# Altium PCB sigma-delta-adc.PcbDoc
Units mm, origin at the board's own origin, x right, y up, seen from the top; angles counter-clockwise.
Board outline 38 x 15 mm, 2 copper layers (Top Layer, Bottom Layer); 16 components, 17 nets, 71 pads, 104 vias.
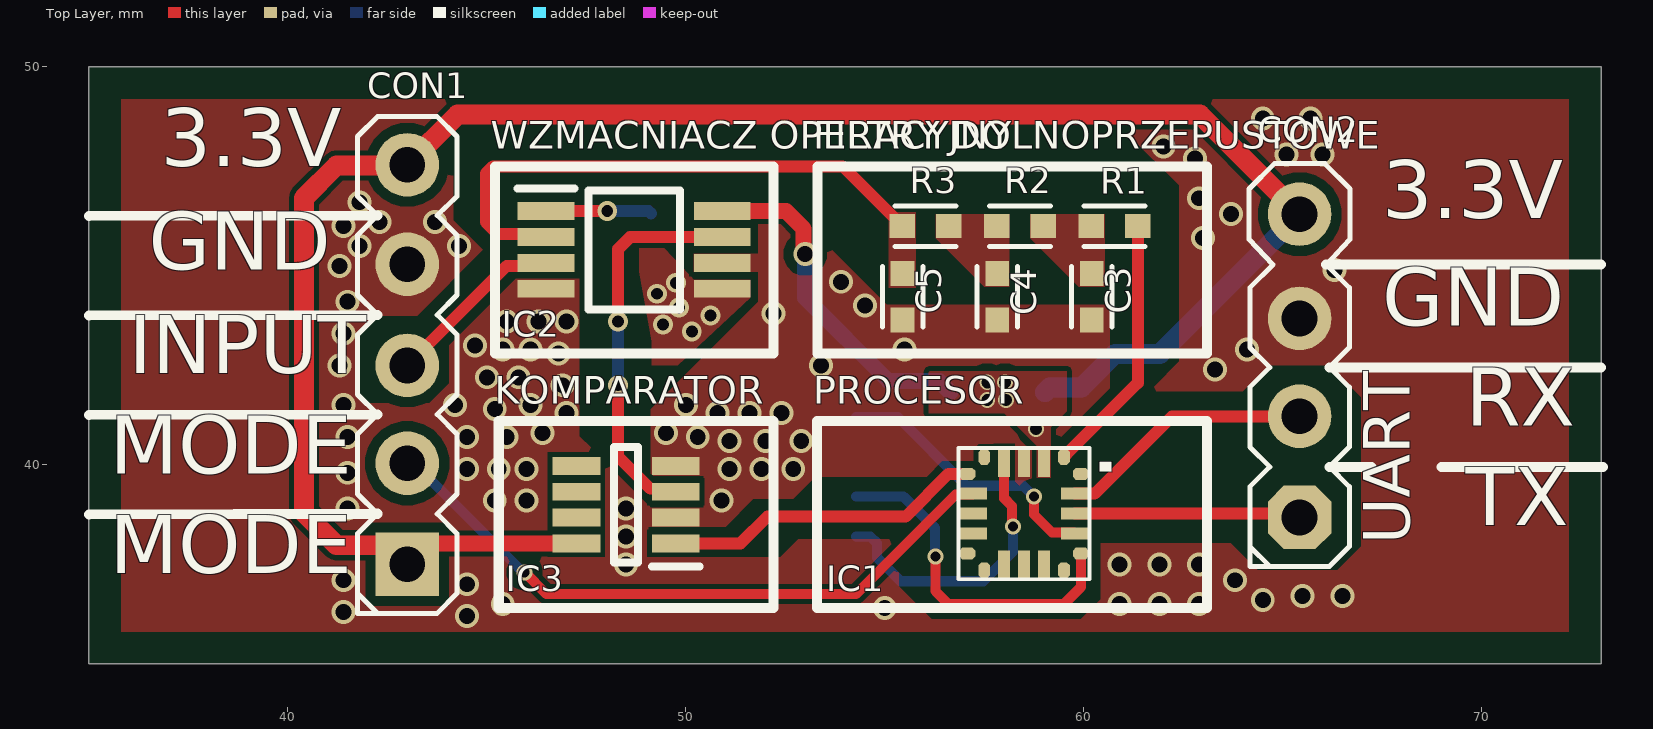
[diagram p0: Top Layer view]
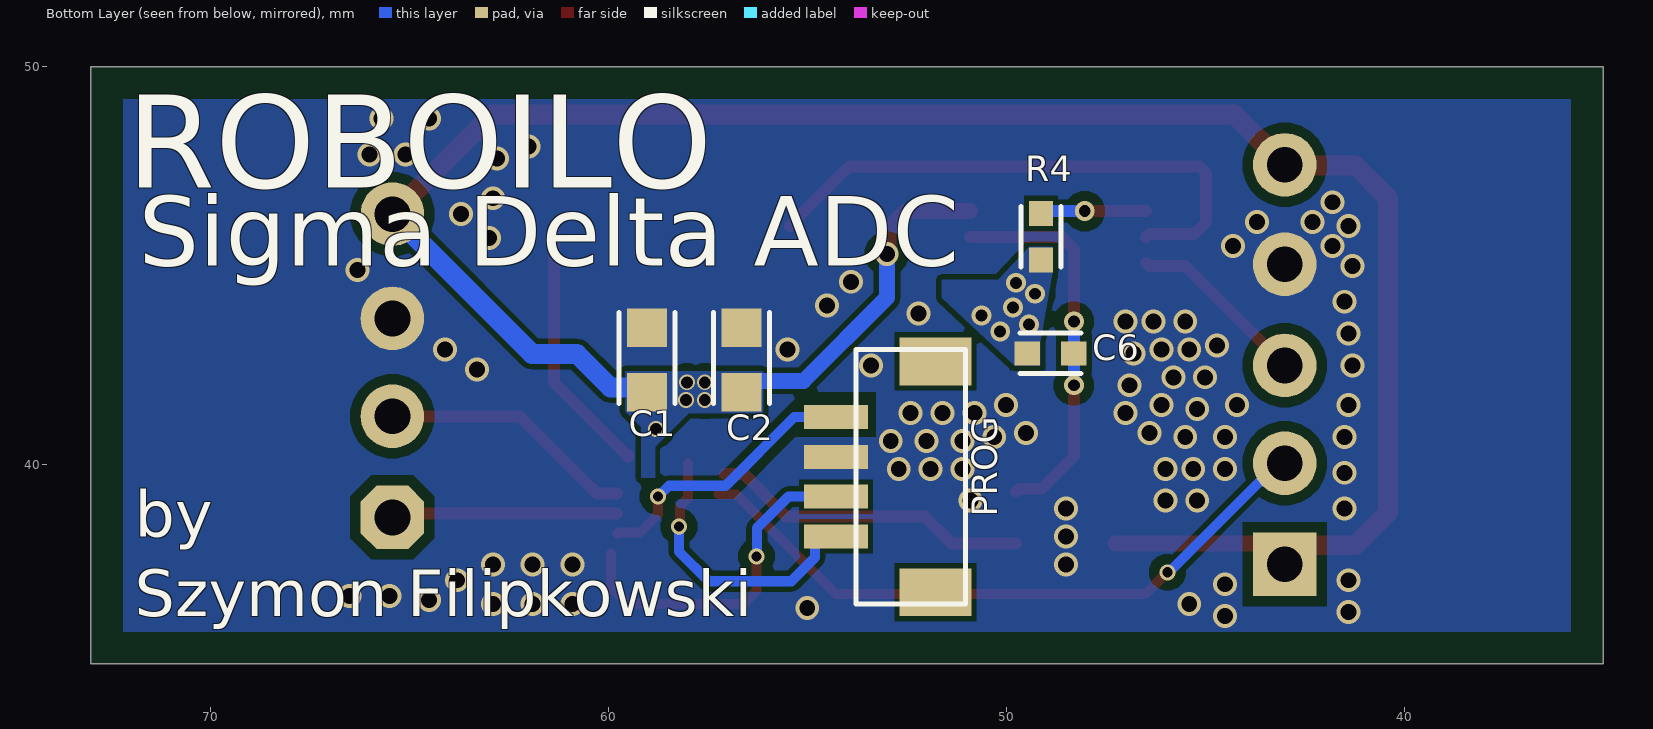
[diagram p1: Bottom Layer view, seen from below]
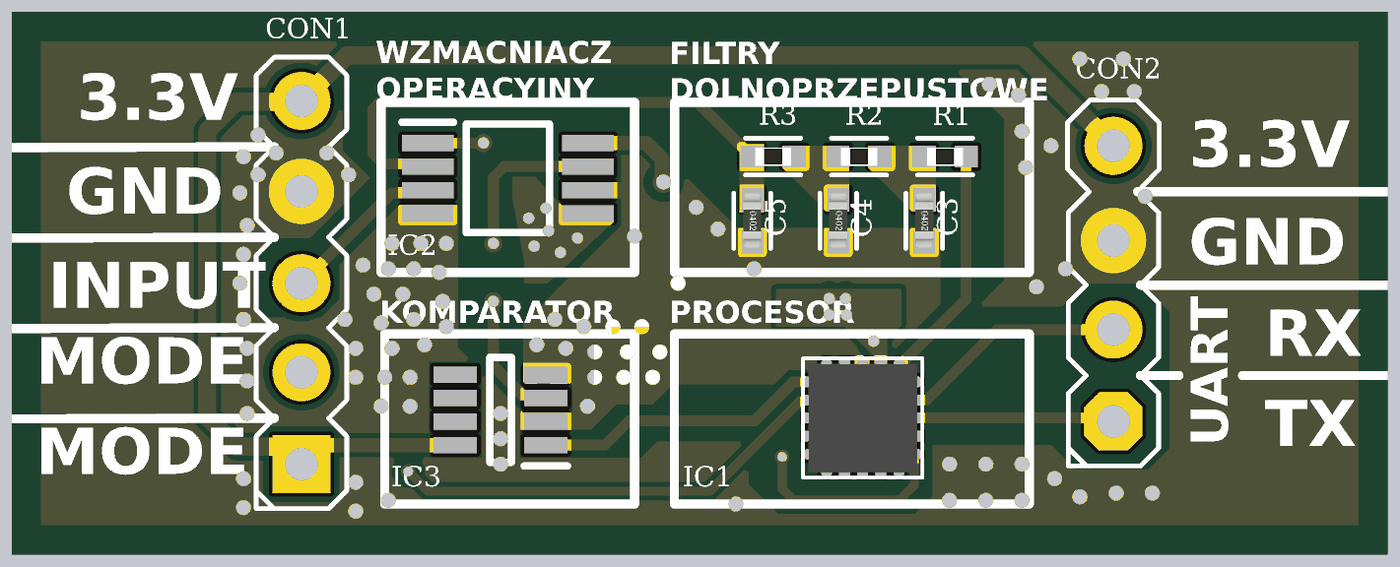
[diagram p2: 3D render of the assembled board from above, using the file's embedded part models]
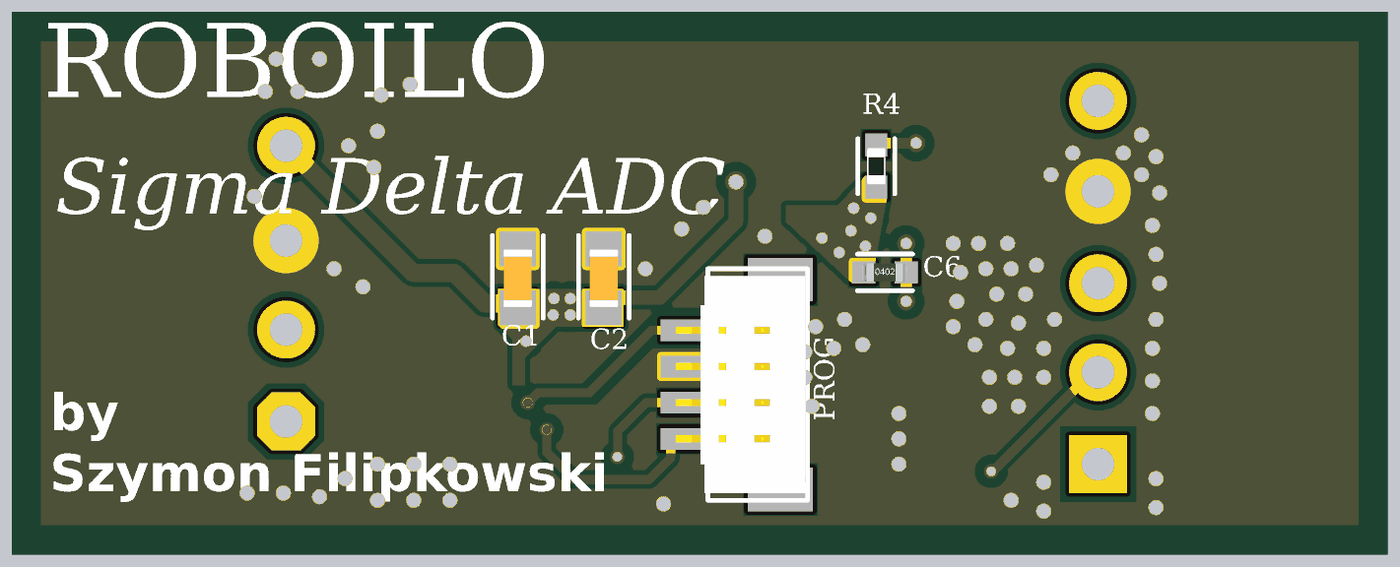
[diagram p3: 3D render of the assembled board from below, using the file's embedded part models]

## Layer stack, top to bottom
Top Solder: solder mask 0.0102, Solder Resist, Dk 3.5
Top Layer: signal copper 0.0356
Dielectric 1: dielectric 0.32, FR-4, Dk 4.8
Bottom Layer: signal copper 0.0356
Bottom Solder: solder mask 0.0102, Solder Resist, Dk 3.5

## Board outline
35,35 73,35 73,50 35,50

## Design rules (kind name [scope] priority, off if disabled: settings)
BoardOutlineClearance [All] p1: gap=0.8 ignorepadtopadclearanceinfootprint=FALSE
Clearance [All] p1: gap=0.127 ignorepadtopadclearanceinfootprint=TRUE except(0.2: Arc-THPad Track-THPad SMDPad-THPad; 0.254: THPad-Fill THPad-Poly THPad-Region Via-Fill Via-Poly Via-Region; 0.33: Arc-Hole Track-Hole SMDPad-Hole THPad-Hole Via-Hole Fill-Hole Poly-Hole Region-Hole; 0.5: THPad-THPad)
HoleSize [All] p1: absolutevalues=TRUE maxlimit=4 minlimit=0.02 maxpercent=80.000 minpercent=20.000
HoleToHoleClearance [All] p1: gap=0.127 allowstackedmicrovias=TRUE
PlaneClearance [All] p1: clearance=0.3
PlaneConnect PlaneConnect_1 [(HasFootprint('R 2512'))] p1: planeconnectstyle=Relief reliefexpansion=0.508 reliefentries=4 reliefconductorwidth=0.254 reliefairgap=0.254
PlaneConnect [All] p2: planeconnectstyle=Relief reliefexpansion=0.508 reliefentries=4 reliefconductorwidth=0.254 reliefairgap=0.254
PolygonConnect "Polygon Power Connection" [(HasFootprint('DFN 5x6')) OR  (HasFootprint('R 2512')) OR  IsVia OR  HasFootprint('SMD PAD')  OR  (HasFootprint('DJNR60454R5FERROCORE'))  OR  (HasFootprint ('SON50P200X200X80-9N-D')) OR (HasFootprint('SOT230P700X180-4N'))  OR    InNetClass('Power')] p1: connectstyle=Direct reliefconductorwidth=0.254 reliefentries=4 polygonreliefangle="90 Angle" airgapwidth=0.254 // Conection to high power components
PolygonConnect [All] p2: connectstyle=Direct reliefconductorwidth=0.254 reliefentries=4 polygonreliefangle="90 Angle" airgapwidth=0.254
RoutingVias [All] p1: holewidth=0.3 width=0.5 viastyle="Through Hole" minholewidth=0.2 minwidth=0.3 maxholewidth=1 maxwidth=1.27
SilkToSilkClearance [All] p1: silktosilkclearance=0.127
SolderMaskExpansion "Tented Vias" [IsVia] p1: expansion=0.102 istentingtop=TRUE
SolderMaskExpansion [All] p2: expansion=0.102 istentingtop=FALSE
Width [All] p1: maxlimit=1 minlimit=0.127 preferedwidth=0.3 minimp=50.000000 maximp=50.000000 favimp=50.000000
25 further rules are at their usual default settings.

## Classes and differential pairs
component class MCU: C1 C2 IC1 PROG
component class "LOW PASS FILTER": C3 C4 C5 R1 R2 R3
component class INTEGRATER: C6 R4
component class "I/O DEVICES": CON1 CON2
component class "DOUBLE OP AMP": IC2
component class COMPARATOR: IC3

## Components (designator, comment, footprint, x,y, rotation, side; value= is the part's Value field where it differs from the comment)
C1 "100nF" "C 0603" 59.025,42.637 r90 bottom locked
C2 "4.7uF" "C 0603" 56.65,42.637 r90 bottom locked
C3 "1uF" "C 0402" 60.2,44.225 r270 top locked
C4 "1uF" "C 0402" 57.825,44.225 r270 top locked
C5 "1uF" "C 0402" 55.45,44.225 r270 top locked
C6 "Value" "C 0402" 48.884,42.8 r180 bottom
CON1 "5 PIN" "Goldpin 2.54mm 5P" 43,42.5 r90 top locked
CON2 "4 PIN" "Goldpin 2.54MM 4P" 65.425,42.49 r90 top locked
IC1 "STM32C011F4U6TR" "UFQFPN20 - byMe" 56.85,40.425 r270 top locked
IC2 "TLV2462CDGKR" SOP65P490X110-8N 48.7,45.4 r0 top locked
IC3 "LM2903BIDDFR" SOT65P280X110-8N 48.5,39 r180 top locked
PROG "4 PIN" BM04B-SRSS-TB 52.775,39.7 r270 bottom locked
R1 "40R" "R 0402" 60.775,46 r180 top locked
R2 "40R" "R 0402" 58.4,46 r180 top locked
R3 "40R" "R 0402" 56.025,46 r180 top locked
R4 "Value" "R 0402" 49.125,45.734 r90 bottom locked

## Footprints (in the part's own frame and the unit in brackets; to place one, negate y for a bottom-side part, rotate by r counter-clockwise, add the part's x,y. Pads: shape width x height; smd on the part's side, far side on the other; paste and mask are expansions set on the pad)
BM04B-SRSS-TB [mm]
  rect 0.6x1.6 smd: 1(-1.5,-1.5) 2(-0.5,-1.5) 3(0.5,-1.5) 4(1.5,-1.5)
  rect 1.2x1.8 smd: A(-2.9,1) B(2.9,1)
  silkscreen extent -3.2,-1 3.2,1.75, body extent -3,-1.9 3,1.7, height 4.25
"C 0402" [mm] "MLCC Capacitor 0402"
  rect 0.635x0.6 smd: 1(-0.584,0) 2(0.584,0)
  silkscreen extent -0.76,-0.51 0.76,0.51, body extent -0.76,-0.25 0.74,0.25, height 0.35
"C 0603" [mil]
  rect 38x39.37 smd: 1(-32,0) 2(32,0)
  silkscreen extent -43,-28 47,28, body extent -31,-16 31,16, height 24
"Goldpin 2.54MM 4P" [mm]
  oct 1.6x1.6 hole 0.9: 1(-3.81,0)
  round 1.6 hole 0.9: 2(-1.27,0) 3(1.19,0) 4(3.81,0)
  silkscreen extent -5.04,-1.27 5.08,1.27
"Goldpin 2.54mm 5P" [mm]
  rect 1.6x1.6 hole 0.9: 1(-5,0)
  round 1.6 hole 0.9: 2(-2.46,0) 3(0,0) 4(2.54,0) 5(5.04,0)
  silkscreen extent -6.23,-1.25 6.25,1.25
"R 0402" [mm] "0402 resistor Chip"
  rect 0.635x0.6 smd: 1(-0.584,0) 2(0.584,0)
  silkscreen extent -0.76,-0.51 0.76,0.51, body extent -0.5,-0.25 0.5,0.25, height 0.31
SOP65P490X110-8N [mm]
  rect 1.425x0.45 smd: 1(-2.212,0.975) 2(-2.212,0.325) 3(-2.212,-0.325) 4(-2.212,-0.975) 5(2.212,-0.975) 6(2.212,-0.325) 7(2.212,0.325) 8(2.212,0.975)
  silkscreen extent -2.93,-1.5 1.15,1.55, body extent -2.45,-1.5 2.45,1.5, height 1.1
SOT65P280X110-8N [mm]
  rect 1.2x0.45 smd: 1(-1.25,0.975) 2(-1.25,0.325) 3(-1.25,-0.325) 4(-1.25,-0.975) 5(1.25,-0.975) 6(1.25,-0.325) 7(1.25,0.325) 8(1.25,0.975)
  silkscreen extent -1.85,-1.45 0.3,1.55, body extent -1.41,-1.45 1.41,1.45, height 0.9
"UFQFPN20 - byMe" [mm]
  oct 0.4x0.3 smd: 1(0.225,2.65) 5(0.225,0.65) 11(3.075,0.65) 15(3.075,2.65)
  rect 0.7x0.3 smd: 2(0.375,2.15) 3(0.375,1.65) 4(0.375,1.15) 12(2.925,1.15) 13(2.925,1.65) 14(2.925,2.15)
  oct 0.3x0.4 smd: 6(0.65,0.225) 10(2.65,0.225) 16(2.65,3.075) 20(0.65,3.075)
  rect 0.3x0.7 smd: 7(1.15,0.375) 8(1.65,0.375) 9(2.15,0.375) 17(2.15,2.925) 18(1.65,2.925) 19(1.15,2.925)
  silkscreen extent 0,0 3.3,3.3, body extent 0.14,0.14 3.16,3.16, height 0.55

## Part data
C1 C2 C3 C4 C5 C6: library part Capacitor, "MLCC Capacitor"
IC2: "Integrated Circuit", Manufacturer_Name="Texas Instruments", Mouser Part Number=595-TLV2462CDGKR, Arrow Part Number=TLV2462CDGKR, Arrow Price/Stock=https://www.arrow.com/en/products/tlv2462cdgkr/texas-instruments?region=nac, Datasheet Link=http://www.ti.com/lit/gpn/TLV2462, Height=1.1mm, Manufacturer_Part_Number=TLV2462CDGKR, Mouser Price/Stock=https://www.mouser.co.uk/ProductDetail/Texas-Instruments/TLV2462CDGKR?qs=Fg5TsMy7H4uE1B0PPHeSQQ%3D%3D
IC3: "Integrated Circuit", Manufacturer_Name="Texas Instruments", Mouser Part Number=595-LM2903BIDDFR, Arrow Part Number=LM2903BIDDFR, Arrow Price/Stock=https://www.arrow.com/en/products/lm2903biddfr/texas-instruments, Datasheet Link=https://www.ti.com/lit/ds/symlink/lm2903b.pdf, Height=1.1mm, Manufacturer_Part_Number=LM2903BIDDFR, Mouser Price/Stock=https://www.mouser.co.uk/ProductDetail/Texas-Instruments/LM2903BIDDFR?qs=zW32dvEIR3tE88esuzsygA%3D%3D
R1 R2 R3 R4: library part Resistor, "General pourpouse resistor"
IC1: ComponentLink1Description=Datasheet, ComponentLink1URL=https://www.alldatasheet.com/datasheet-pdf/download/1583958/STMICROELECTRONICS/STM32C011F4U6TR.html

## Via types
v1: diameter 0.6, hole 0.4, Top Layer to Bottom Layer, tented both sides, 86 vias
v2: diameter 0.5, hole 0.3, Top Layer to Bottom Layer, tented both sides, 9 vias
v3: diameter 0.4, hole 0.3, Top Layer to Bottom Layer, tented both sides, 5 vias
v4: diameter 0.4, hole 0.254, Top Layer to Bottom Layer, tented both sides, 4 vias

## Nets (pads, with @x,y where several pads share a name; then routed paths per layer and width w, separated by ;. In a path a pad name is that pad's centre, name@x,y a point inside that pad or via, vN(x,y) a via of type N, cw(c..) or ccw(c..) an arc to the next point about the centre after c; other vN are vias at no path point)
3.3V: C1.1 C2.1 CON1.1 CON1.5 CON2.4 IC1.2 IC2.8 IC3.8 | length 59.3
  Top Layer w0.4: CON1.1 43.525,38.025 IC3.8 ; IC2.8 52.519,46.375 52.962,45.933 52.962,45.338 v1(53,45.3)
  Top Layer w0.5: CON1.1 42.52,37.98 41.22,37.98 40.4,38.8 40.4,46.7 41.224,47.524 42.984,47.524 CON1.5 44.26,48.8 62.925,48.8 CON2.4
  Bottom Layer w0.4: v1(53,45.3) 53,44.2 55.093,42.107 56.367,42.107 C2.1
  Bottom Layer w0.5: C1.1 59.147,41.946 59.946,41.946 60.788,42.788 61.913,42.788 CON2.4
  other v3: 58.8,40.9 57.575,41.625 58.05,41.625 57.575,42.075 58.025,42.075
GND: C1.2 C2.2 C3.2 C4.2 C5.2 CON1.4 CON2.3 IC1.3 IC2.4 IC2.6 IC3.2 IC3.4 PROG.2
  other v1: 44.5,36.2 41.4,36.3 55,36.4 45.4,36.5 60.9,36.5 61.9,36.5 62.9,36.5 64.5,36.6 65.5,36.7 66.5,36.7 44.5,37 41.4,37.1 63.8,37.1 48.5,37.5 60.9,37.5 61.9,37.5 62.9,37.5 48.5,38.2 41.5,38.9 48.5,38.9 45.2,39.1 46,39.1 50.9,39.1 41.5,39.8 44.5,39.9 45.3,39.9 46,39.9 51.1,39.9 51.9,39.9 52.7,39.9 51.1,40.6 52,40.6 52.9,40.6 41.5,40.7 44.5,40.7 45.5,40.7 50.3,40.7 46.4,40.8 49.5,40.8 47,41.3 50.8,41.3 51.6,41.3 52.4,41.3 45.2,41.4 41.4,41.5 44.2,41.5 46.1,41.5 50,41.5 46.9,42 45,42.2 45.8,42.2 63.3,42.4 41.3,42.5 53.4,42.5 46.8,42.8 45.4,42.9 46.1,42.9 55.5,42.9 64.1,42.9 44.7,43 41.4,43.3 45.5,43.6 46.3,43.6 47,43.6 52.2,43.8 54.5,44 41.5,44.1 53.9,44.6 66.3,44.9 41.3,45 41.8,45.5 44.3,45.5 63,45.7 41.4,46 42.3,46.1 43.7,46.1 63.7,46.3 41.8,46.6 62.9,46.7 62.8,47.7 65.1,47.8 66,47.8 62,48 64.5,48.7 65.7,48.7
MODE_SEL: CON1.2 IC1.7 | length 16.6
  Top Layer w0.254: v4(45.95,37.3) 46.5,36.75 54.275,36.75 56.777,39.252 57.202,39.252 IC1.7
  Bottom Layer w0.254: CON1.2 43.17,40.04 45.91,37.3 v4(45.95,37.3)
NetC3_1: C3.1 R1.2 R2.1
NetC4_1: C4.1 R2.2 R3.1
NetC5_1: C5.1 IC2.2 R3.2 | length 14.1
  Top Layer w0.3: IC2.2 46.413,45.8 45.275,45.8 44.975,46.1 44.975,47.324 45.151,47.5 53.941,47.5 55.273,46.167 55.273,46.15 55.423,46 R3.2
NetC6_1: C6.1 IC2.5 R4.1
  other v2: 50.15,43.35 49.425,43.525 50.625,43.75 49.825,43.95 49.275,44.3 49.75,44.575
NetC6_2: C6.2 IC2.7 IC3.3 | length 9.8
  Top Layer w0.3: v2(48.3,42) 48.3,40.208 49.108,39.4 49.675,39.4 IC3.3 ; v2(48.3,43.6) 48.3,45.425 48.6,45.725 IC2.7
  Bottom Layer w0.3: v2(48.3,42) C6.2 v2(48.3,43.6)
NetCON1_3: CON1.3 IC2.3 | length 4.6
  Top Layer w0.3: CON1.3 45.5,45 46.413,45 IC2.3
NetIC1_1: IC1.1 R1.1 | length 6.6
  Top Layer w0.3: IC1.1 59.5,40.25 59.55,40.25 61.359,42.059 R1.1
NetIC1_6: IC1.6 IC3.1 | length 8
  Top Layer w0.3: IC3.1 51.375,38.025 52.05,38.7 55.525,38.7 56.6,39.775 IC1.6
NetIC2_1: IC2.1 R4.2 | length 2.7
  Top Layer w0.3: IC2.1 v2(48.025,46.375)
  Bottom Layer w0.3: v2(48.025,46.375) 49.068,46.375 R4.2
RESET: IC1.4 PROG.4 | length 7.3
  Top Layer w0.254: IC1.4 58,39.158 58.197,38.961 58.197,38.478 v4(58.225,38.45)
  Bottom Layer w0.254: PROG.4 54.634,38.2 54.807,38.027 54.807,37.668 55.4,37.075 57.475,37.075 58.225,37.825 v4(58.225,38.45)
SWCLK: IC1.17 PROG.1 | length 7
  Top Layer w0.254: v4(58.75,39.2) 58.75,38.75 59.202,38.298 59.752,38.298 IC1.17
  Bottom Layer w0.254: PROG.1 55.325,41.2 57.05,39.475 58.475,39.475 v4(58.75,39.2)
SWDIO: IC1.16 PROG.3 | length 8.7
  Top Layer w0.254: v4(56.275,37.7) 56.275,36.825 56.6,36.5 59.5,36.5 59.927,36.927 IC1.16 IC1.16
  Bottom Layer w0.254: PROG.3 55.475,39.2 56.267,38.408 56.267,37.708 v4(56.275,37.7)
UART_RX: CON2.2 IC1.19 | length 6.5
  Top Layer w0.3: IC1.19 60.275,39.275 62.22,41.22 CON2.2
UART_TX: CON2.1 IC1.18 | length 5.7
  Top Layer w0.3: IC1.18 65.33,38.775 CON2.1
pads on no net: IC1.5 IC1.8 IC1.9 IC1.10 IC1.11 IC1.12 IC1.13 IC1.14 IC1.15 IC1.20 IC3.5 IC3.6 IC3.7 PROG.A PROG.B

## Polygon pours and split planes (outlines as drawn)
GND on Bottom Layer "GND_L02_P024" (solid, pour order 24): 35,50 73,50 73,35 35,35
3.3V on Bottom Layer "3.3V_L02_P020" (solid, pour order 20): 59.175,39.675 59.175,40.95 59.575,41.35 59.575,42.35 56.125,42.35 56.1,42.325 56.1,41.3 57.975,41.3 58.825,40.45 58.825,39.675
NetC6_1 on Bottom Layer "NETC6_1_L02_P000" (solid, pour order 0): 48.825,45.475 48.825,44.875 49.15,43.075 49.15,42.5 49.8,42.5 51.625,44.2 51.625,44.65 50.2,44.65 49.425,45.475
GND on Top Layer "GND_L01_P023" (solid, pour order 23): 35,50 73,50 73,35 35,35
3.3V on Top Layer "3.3V_L01_P021" (solid, pour order 21): 59.175,39.675 59.175,40.95 59.575,41.35 59.575,42.35 56.125,42.35 56.1,42.325 56.1,41.3 58,41.3 58.825,40.475 58.825,39.675
NetC5_1 on Top Layer "NETC5_1_L01_P009" (solid, pour order 9): 55.775,46.35 55.775,44.45 55.1,44.45 55.1,46.35
NetC4_1 on Top Layer "NETC4_1_L01_P005" (solid, pour order 5): 58.125,44.475 58.125,46.3 56.275,46.3 56.275,45.7 57.5,44.475 57.525,44.475
NetC3_1 on Top Layer "NETC3_1_L01_P004" (solid, pour order 4): 58.65,46.3 60.525,46.3 60.525,44.475 59.875,44.475 58.65,45.7
NetC6_1 on Top Layer "NETC6_1_L01_P001" (solid, pour order 1): 49.15,42.5 49.15,43.1 48.825,44.85 48.825,45.475 49.425,45.475 50.2,44.65 51.625,44.65 51.625,44.2 49.8,42.5

## Other copper
Top Layer:
  pour cut-out: 59.325,39.525 62.4,42.6 62.4,47.025 61.075,48.35 44.8,48.35 44.15,47.7 44.15,46.15 44.9,45.4 47.35,45.4 47.35,45.975 47.3,46.025 45.6,46.025 45.4,46.225 45.4,46.875 45.45,46.925 52.925,46.925 53.45,46.4 53.45,45.625 55.05,44.025 60.525,44.025 60.65,43.9 60.65,41.925 59.2,40.475 59.2,39.675
  pour cut-out: 60.425,38.025 59.925,38.525 59.325,38.525 59.025,38.825 59.025,39.425 58.975,39.475 58.55,39.475 58.4,39.325 58.4,38.7 59.075,38.025
  pour cut-out: 59.325,38.525 59.925,38.525 60.425,38.025 63.7,38.025 64.375,37.35 66.375,37.35 66.975,37.95 66.975,41.7 66.175,42.5 64.65,42.5 64,41.85 61.65,41.85 59.325,39.525
  pour cut-out: 55.35,38.125 55.35,36.95 56.175,36.125 59.925,36.125 60.425,36.625 60.425,38.025 59.625,38.025 59.3,37.7 59.3,37.025 59.15,36.875 57.125,36.875 56.725,37.275 56.725,38.475 56.2,39
  pour cut-out: 49.05,38.45 51,38.45 51.7,39.15 52.7,39.15 53.25,39.7 56.05,39.7 56.45,40.1 57.225,40.1 57.475,39.85 57.475,39.65 57.4,39.575 56.8,39.575 55.35,38.125 52.825,38.125 52.375,37.675 49.05,37.675
  pour cut-out: 47.325,40.725 49.125,38.925 50.45,38.925 50.45,39.725 49.125,39.725 49.125,41.4 51.825,44.1 51.825,44.85 50.2,44.85 50.2,45.3 51.825,45.3 51.825,46.125 50.025,46.125 49.65,46.5 49.65,46.675 49.4,46.925 45.45,46.925 45.4,46.875 45.4,46.225 45.6,46.025 47.3,46.025 47.3,45.45 47.35,45.4 47.325,45.375
  pour cut-out: 41.975,41.55 43.55,41.55 44.05,42.05 44.05,43 45.725,44.675 47.325,44.675 47.35,44.7 47.35,45.4 44.9,45.4 43.25,43.75 42.225,43.75 41.8,43.325 41.8,41.725
Bottom Layer:
  pour cut-out: 58.425,38.95 58.9,38.95 59.05,39.1 59.05,39.35 58.725,39.675 57.3,39.675 55.15,41.825 53.275,41.825 53.275,40.7 55.3,40.7 56.85,39.15 58.225,39.15

## Silkscreen, mask and mechanical layers (free items; w line width, h text height)
Top Overlay:
  lines w0.254: 35,38.75 42.25,38.77 ; 35,41.25 42.25,41.27 ; 35,43.75 42.25,43.77 ; 35,46.25 42.25,46.27 ; 66.095,45.03 72.997,45.03 ; 66.175,39.95 67.229,39.95 ; 66.175,42.45 72.996,42.45 ; 68.995,39.95 73.051,39.95 ; 45.2,42.8 45.2,47.5 52.2,47.5 52.2,42.8 45.2,42.8 ; 45.3,36.4 45.3,41.1 52.2,41.1 52.2,36.4 45.3,36.4 ; 53.3,36.4 53.3,41.1 63.1,41.1 63.1,36.4 53.3,36.4 ; 53.308,42.8 63.1,42.8 63.1,47.5 53.308,47.5 53.308,42.8
  text "WZMACNIACZ OPERACYJNY" at 45.1,47.7 h1.2
  text "FILTRY DOLNOPRZEPUSTOWE" at 53.2,47.7 h1.2
  text "3.3V" at 36.802,47.023 h2.5
  text "3.3V" at 67.502,45.723 h2.5
  text "GND" at 36.5,44.423 h2.5
  text "GND" at 67.5,43.023 h2.5
  text "INPUT" at 36.002,41.823 h2.5
  text "KOMPARATOR" at 45.2,41.3 h1.2
  text "PROCESOR" at 53.2,41.3 h1.2
  text "RX" at 69.602,40.5 h2.5
  text "MODE" at 35.529,39.3 h2.5
  text "UART" at 68.582,38.001 h2 r90
  text "TX" at 69.6,38 h2.5
  text "MODE" at 35.529,36.8 h2.5
Bottom Overlay:
  text "ROBOILO" at 72.1,46.2 h4
  text "Sigma Delta ADC" at 71.798,44.429 h3
  text "by  / Szymon Filipkowski" at 71.9,35.8 h2